# Altium PCB 4layer_main_board.PcbDoc
Units mm, origin at the board's own origin, x right, y up, seen from the top; angles counter-clockwise.
Board outline 50 x 100 mm, 4 copper layers (Top Layer, Int1 (GND), Int2 (PWR), Bottom Layer), stack 1.369 mm thick; 33 components, 53 nets, 250 pads, 73 vias.
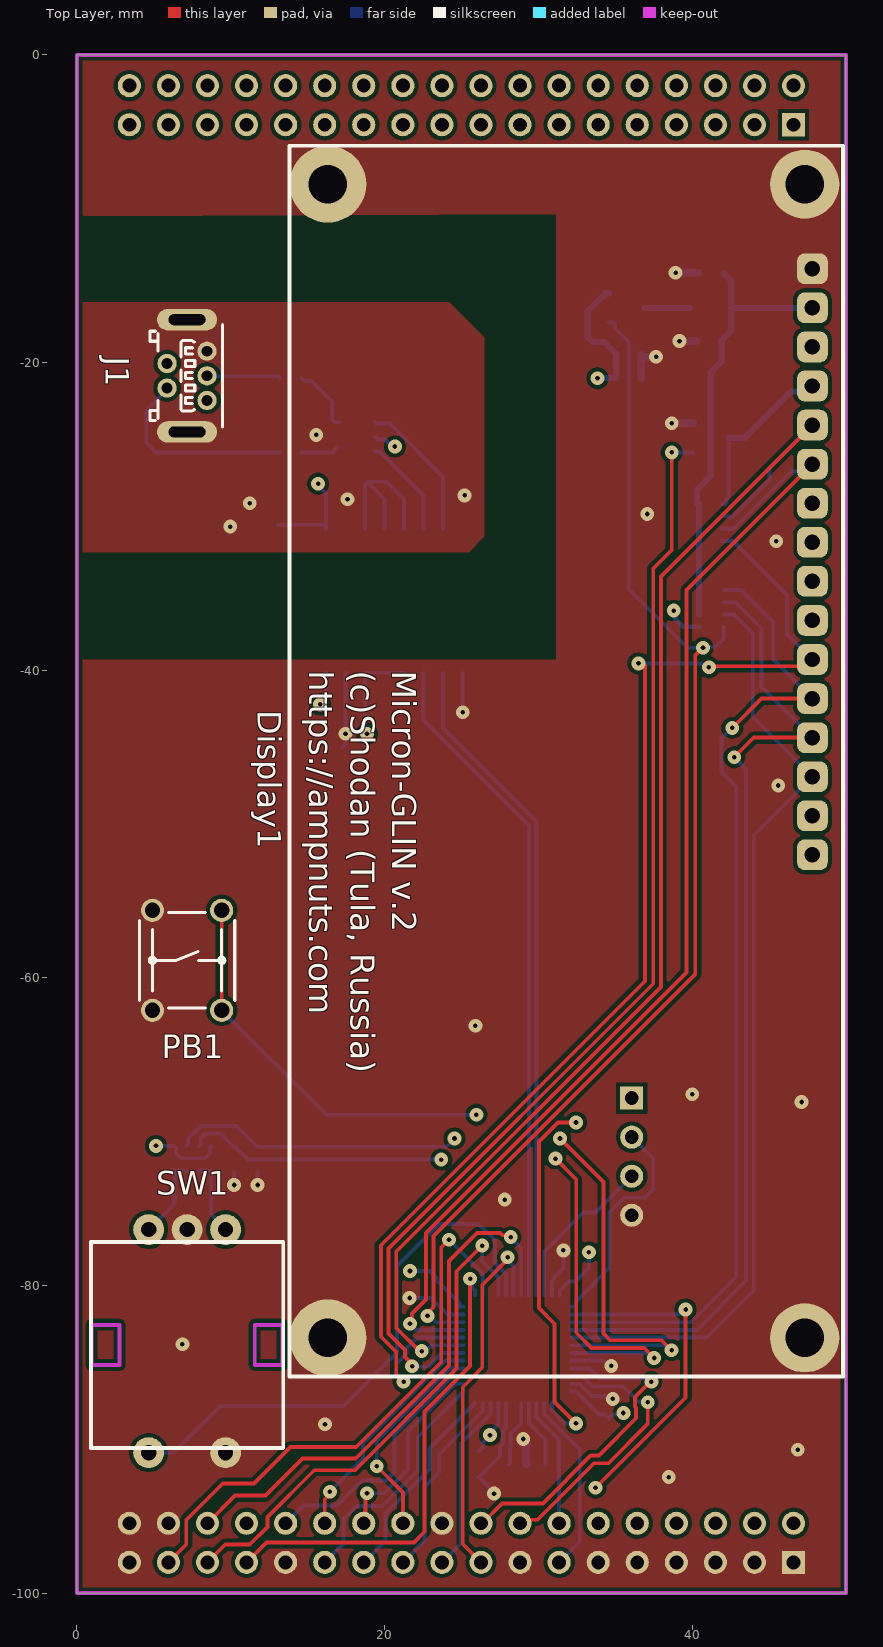
[diagram p0: Top Layer view]
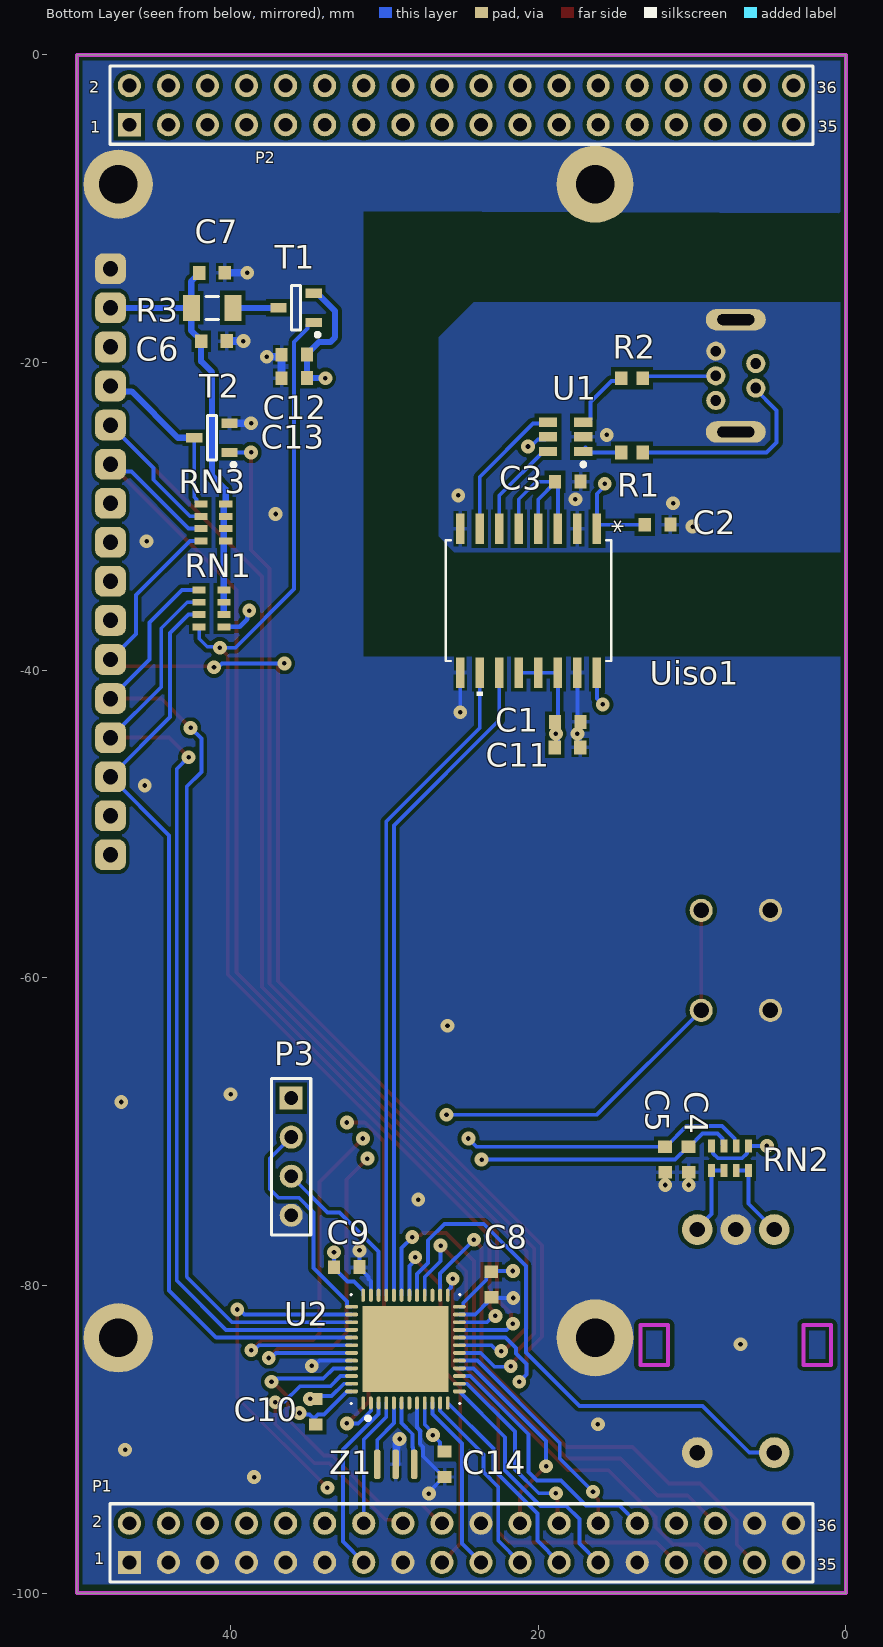
[diagram p1: Bottom Layer view, seen from below]
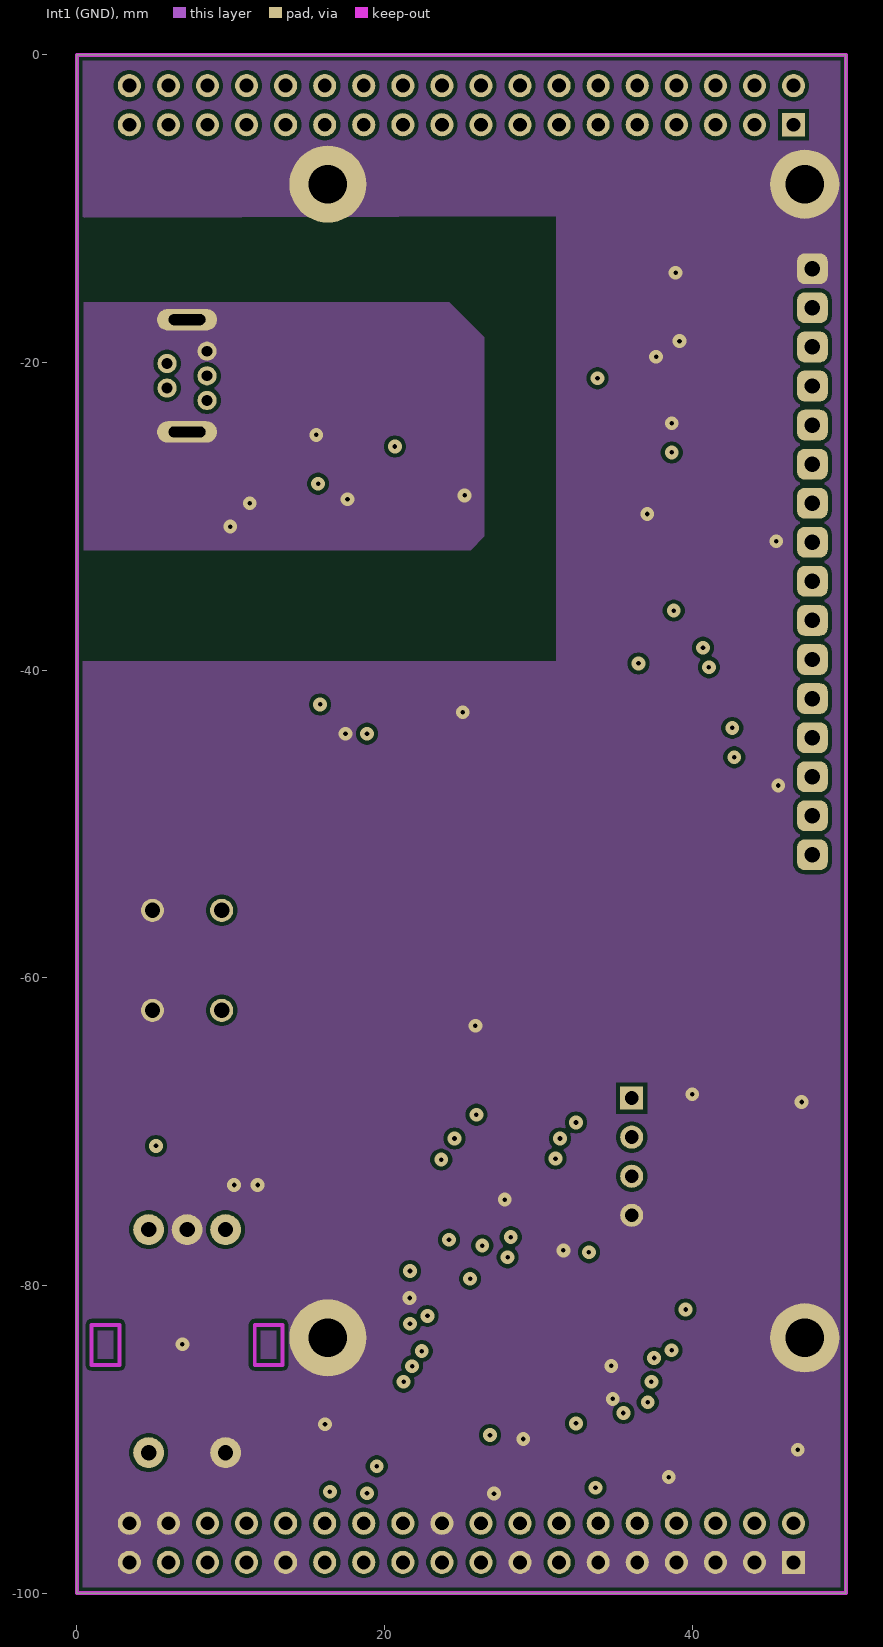
[diagram p2: Int1 (GND)]
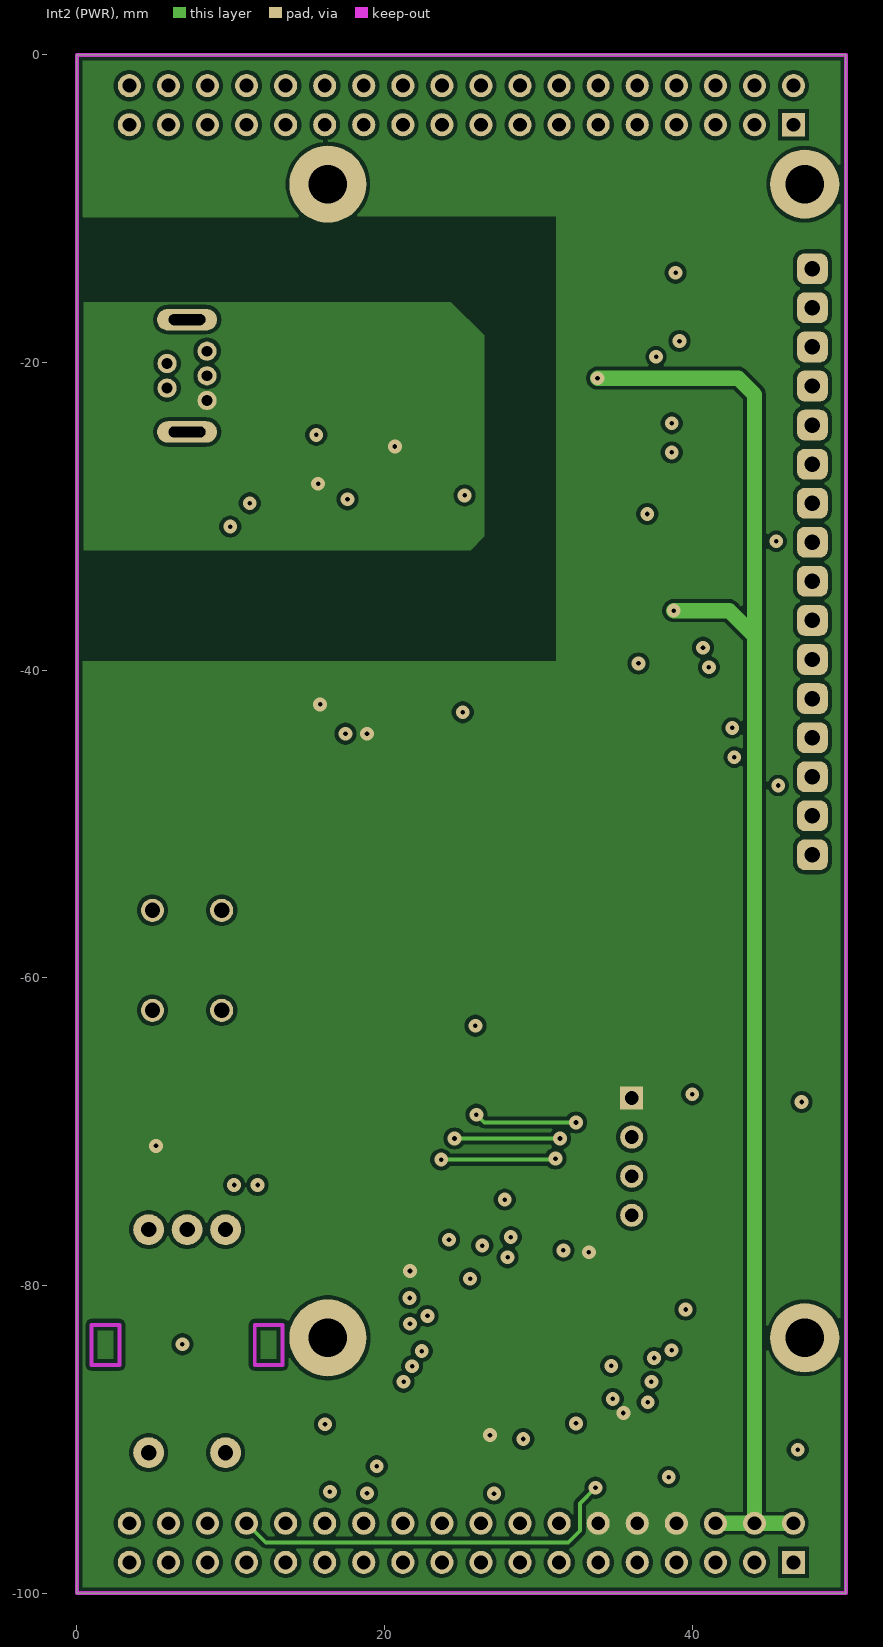
[diagram p3: Int2 (PWR)]
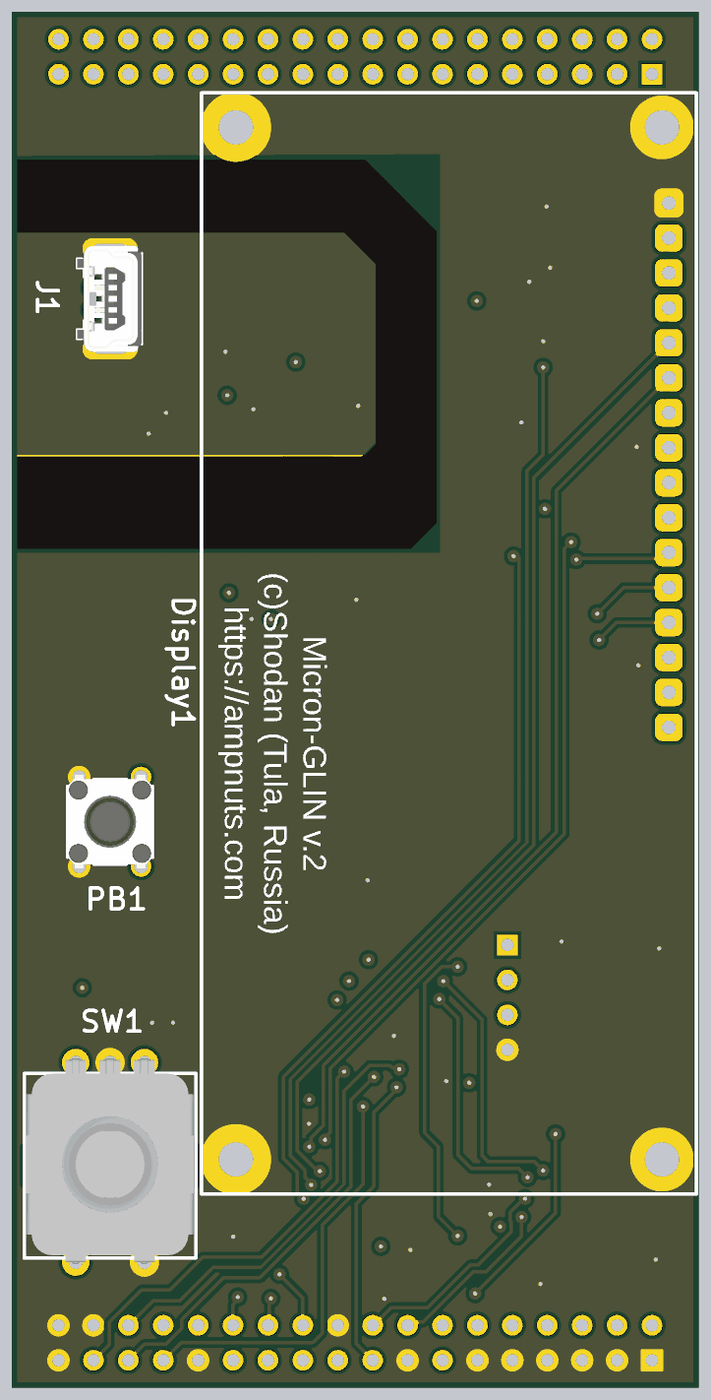
[diagram p4: 3D render of the assembled board from above, using the file's embedded part models]

## Layer stack, top to bottom
Top Solder: solder mask 0.0254, SM-001, Dk 4
Top Layer: signal copper 0.035
Dielectric 1: prepreg 0.1295, PP-017, Dk 4.3
Dielectric 2: prepreg 0.1295, PP-017, Dk 4.3
Int1 (GND): signal copper 0.035
Dielectric 3: core 0.7112, Core-039, Dk 4.8
Int2 (PWR): signal copper 0.035
Dielectric 4: prepreg 0.1295, PP-017, Dk 4.3
Dielectric 5: prepreg 0.1295, PP-017, Dk 4.3
Bottom Layer: signal copper 0.035
Bottom Solder: solder mask 0.0254, SM-001, Dk 4

## Board outline
0,-100 50,-100 50,0 0,0

## Design rules (kind name [scope] priority, off if disabled: settings)
BoardOutlineClearance [All] p1: gap=0.381 ignorepadtopadclearanceinfootprint=FALSE
Clearance "Clearance Polygons" [InPolygon] p1: gap=0.254 ignorepadtopadclearanceinfootprint=FALSE except(0: Arc-Hole Track-Hole SMDPad-Hole THPad-Hole Via-Hole Fill-Hole Poly-Hole Region-Hole Text-Hole)
Clearance [All] p2: gap=0.25 ignorepadtopadclearanceinfootprint=FALSE
ComponentClearance "HM-TRP & UFL" [InComponent('X1') vs InComponent('U1')] p1: gap=0 collisioncheckmode=3 verticalgap=0 showdistances=FALSE
ComponentClearance [All] p2: gap=0.025 collisioncheckmode=3 verticalgap=0.025 showdistances=FALSE
DiffPairsRouting [All] p1: maxlimit=10 minlimit=0.127 mostfreqgap=0.203 toplayer_minwidth=0.127 toplayer_maxwidth=0.381 toplayer_prefwidth=0.203 midlayer1_minwidth=0.127 midlayer1_maxwidth=0.381 midlayer1_prefwidth=0.203 midlayer2_minwidth=0.127 midlayer2_maxwidth=0.381 midlayer2_prefwidth=0.203 bottomlayer_minwidth=0.127 bottomlayer_maxwidth=0.381 bottomlayer_prefwidth=0.203 maxuncoupledlength=12.7
HoleSize [All] p1: absolutevalues=TRUE maxlimit=6.731 minlimit=0.254 maxpercent=80.000 minpercent=20.000
HoleToHoleClearance [All] p1: gap=0.254 allowstackedmicrovias=FALSE
MinimumAnnularRing [All] p1: minimumring=0.102
MinimumSolderMaskSliver [All] p1: minsoldermaskwidth=0
PlaneClearance [All] p1: clearance=0.254
PlaneConnect [All] p1: planeconnectstyle=Relief reliefexpansion=0.102 reliefentries=4 reliefconductorwidth=0.152 reliefairgap=0.152
PolygonConnect PolygonConnect_pwr_gnd [IsPoly] p1: thpad.connectstyle=Direct thpad.reliefconductorwidth=0.254 thpad.reliefentries=4 thpad.polygonreliefangle="90 Angle" thpad.airgapwidth=0.152 smdpad.connectstyle=Relief smdpad.reliefconductorwidth=0.254 smdpad.reliefentries=4 smdpad.polygonreliefangle="90 Angle" smdpad.airgapwidth=0.152 via.connectstyle=Direct via.reliefconductorwidth=0.254 via.reliefentries=4 via.polygonreliefangle="90 Angle" via.airgapwidth=0.152
PolygonConnect PolygonConnect_1 [All] p2: connectstyle=Relief reliefconductorwidth=0.254 reliefentries=4 polygonreliefangle="90 Angle" airgapwidth=0.254
PolygonConnect "Via connect style" [isVia] p3: connectstyle=Direct reliefconductorwidth=0.254 reliefentries=4 polygonreliefangle="90 Angle" airgapwidth=0.254
RoutingCorners [All] p1: cornerstyle=45-Degree minsetback=1.25 maxsetback=1.25
RoutingVias [All] p1: holewidth=0.305 width=0.559 viastyle="Through Hole" minholewidth=0.254 minwidth=0.457 maxholewidth=2.54 maxwidth=2.896
SilkToSilkClearance [All] p1: silktosilkclearance=0
SilkToSolderMaskClearance [IsPad] p1: minsilkscreentomaskgap=0.127 clearancetoexposedcopper=TRUE
SolderMaskExpansion [All] p1: expansion=0.064 istentingtop=FALSE
Width GND [InNet('GND')] p1: maxlimit=0.762 minlimit=0.254 preferedwidth=0.508
Width Power [InNetClass('Power')] p2: maxlimit=1.016 minlimit=0.508 preferedwidth=0.762
Width 3V3 [InNetClass('3V3')] p3: maxlimit=0.762 minlimit=0.254 preferedwidth=0.508
Width [All] p4: maxlimit=10.16 minlimit=0.25 preferedwidth=0.25
20 further rules are at their usual default settings.

## Components (designator, comment, footprint, x,y, rotation, side; value= is the part's Value field where it differs from the comment)
C1 "100nF" "CAP 0603" 18.097,-43.37 r0 bottom
C2 "100nF" "CAP 0603" 12.255,-30.543 r0 bottom
C3 "100nF" "CAP 0603" 18.097,-27.749 r0 bottom
C4 "10nF" "CAP 0603" 10.223,-71.818 r270 bottom
C5 "10nF" "CAP 0603" 11.747,-71.818 r270 bottom
C6 "100nF (0603)" "CAP 0603" 41.084,-18.605 r180 bottom
C7 "10uF (0603)" "CAP 0603" 41.211,-14.16 r180 bottom
C8 "100nF (0603)" "CAP 0603" 23.05,-79.946 r270 bottom
C9 "100nF (0603)" "CAP 0603" 32.448,-78.803 r180 bottom
C10 "100nF (0603)" "CAP 0603" 34.48,-88.201 r90 bottom
C11 "10uF (0603)" "CAP 0603" 18.097,-45.021 r180 bottom
C12 "100nF (0603)" "CAP 0603" 35.877,-19.494 r0 bottom
C13 "10uF (0603)" "CAP 0603" 35.877,-21.018 r0 bottom
C14 "100nF (0603)" "CAP 0603" 26.098,-91.63 r270 bottom
Display1 "WEG010016A" WEG010016A 31.815,-45.906 r270 top locked
J1 "USB" MOLEX_500075-1517 7.163,-20.864 r270 top locked
P1 "Header 18X2" HDR2X18 46.59,-98 r180 bottom locked
P2 "Header 18X2" HDR2X18 46.59,-4.54 r180 bottom locked
P3 "SWD" HDR1X4 36.068,-67.818 r270 bottom
PB1 "Push Button" PB_OMRON_B3F-1070 7.163,-58.864 r270 top locked
R1 "22R" 1608[0603] 13.906,-25.844 r180 bottom
R2 "22R" 1608[0603] 13.906,-21.018 r180 bottom
R3 "Ferrite beard 1k" C1206 41.211,-16.446 r180 bottom
RN1 "CAT16-472J4 (4.7k)" CAT16-470J4LF 42.049,-37.585 r90 bottom
RN2 "CAT16-103J4 (10k)" CAT16-470J4LF 5.937,-72.529 r0 bottom
RN3 "CAT16-472J4 (4.7k)" CAT16-470J4LF 41.922,-31.997 r90 bottom
SW1 "PEC11R-4220K-S0024" PEC11R-4220K-S0024 7.163,-83.864 r180 top locked
T1 "IRLML6402PBF" SOT95P237X112-3N 35.75,-16.446 r0 bottom
T2 "IRLML0060TRPBF" SOT95P237X112-3N 41.218,-24.894 r0 bottom
U1 "USBLC6-2" SOT23-6L 18.224,-24.828 r0 bottom
U2 "STM32L152CBU6" UFQFPN48 28.638,-84.137 r90 bottom
Uiso1 "" RW_16_ADI 20.637,-35.483 r270 bottom
Z1 "8MHZ CSTCE8M00G55-R0" PRQV8.00CR5010Y000 29.273,-91.63 r0 bottom

## Footprints (in the part's own frame and the unit in brackets; to place one, negate y for a bottom-side part, rotate by r counter-clockwise, add the part's x,y. Pads: shape width x height; smd on the part's side, far side on the other; paste and mask are expansions set on the pad)
1608[0603] [mm]
  rect 0.8x0.9 smd: 1(-0.7,0) 2(0.7,0)
  body extent -0.87,-0.48 0.87,0.48, height 1.3
C1206 [mm]
  rect 1.1x1.7 smd: 1(-1.35,0) 2(1.35,0)
  silkscreen extent -0.4,-0.75 0.4,0.75, body extent -1.7,-0.9 1.7,0.9, height 1.3
"CAP 0603" [mm]
  rect 0.8x0.9 smd: 1(-0.84,-0.01) 2(0.82,0)
  body extent -0.85,-0.45 0.85,0.45, height 0.8
CAT16-470J4LF [mm]
  rect 0.45x0.85 smd: 1(0.4,0) 2(1.2,0) 3(2,0) 4(2.8,0) 5(0.4,-1.6) 6(1.2,-1.6) 7(2,-1.6) 8(2.8,-1.6)
  body extent 0,-1.6 3.2,0, height 0.5
HDR1X4 [mm]
  rect 1.5x1.5 hole 0.9: 1(0,0)
  round 1.5 hole 0.9: 2(2.54,0) 3(5.08,0) 4(7.62,0)
  silkscreen extent -1.27,-1.27 8.89,1.27
HDR2X18 [mm] "Connector; Header; 18x2 Position"
  rect 1.5x1.5 hole 0.9: 1(0,0)
  round 1.5 hole 0.9: 2(0,2.54) 3(2.54,0) 4(2.54,2.54) 5(5.08,0) 6(5.08,2.54) 7(7.62,0) 8(7.62,2.54) 9(10.16,0) 10(10.16,2.54) 11(12.7,0) 12(12.7,2.54) 13(15.24,0) 14(15.24,2.54) 15(17.78,0) 16(17.78,2.54) 17(20.32,0) 18(20.32,2.54) 19(22.86,0) 20(22.86,2.54) 21(25.4,0) 22(25.4,2.54) 23(27.94,0) 24(27.94,2.54) 25(30.48,0) 26(30.48,2.54) 27(33.02,0) 28(33.02,2.54) 29(35.56,0) 30(35.56,2.54) 31(38.1,0) 32(38.1,2.54) 33(40.64,0) 34(40.64,2.54) 35(43.18,0) 36(43.18,2.54)
  silkscreen extent -1.27,-1.27 44.45,3.81
MOLEX_500075-1517 [mm] "Straight, USB Serie Mini-B Type 2 Through Hole Receptacle"
  round 1.25 hole 0.7: 1(1.6,1.3) 2(0.8,-1.3) 3(0,1.3) 4(-0.8,-1.3) 5(-1.6,1.3)
  oval 1.4x3.9 hole 0.7 slot 2.4 at 90 deg: 6(-3.65,0) 6(3.65,0)
  silkscreen extent -3.32,-2.4 3.32,2.3, body extent -3.85,-2.4 3.85,2.3, height 7.7
PB_OMRON_B3F-1070 [mm] "6x6mm Model, Horizontal, Flat Plunger Type (without Ground Terminal) Pushbutton Switch, OMRON B3F Series"
  round 1.5 hole 1: 1(-3.25,2.25) 2(3.25,2.25) 3(-3.25,-2.25) 4(3.25,-2.25)
  silkscreen extent -3.1,-3.1 3.1,3.1, body extent -3.4,-3.1 3.4,3.1, height 9.5
PEC11R-4220K-S0024 [mm]
  round 2 hole 1: 1(2.5,7) 2(-2.5,7) A(2.5,-7.5) B(-2.5,-7.5) C(0,-7.5)
  Keep-Out Layer lines w0.254: 6.2,1.3 6.2,-1.3 4.4,-1.3 4.4,1.3 6.2,1.3 ; -4.4,1.3 -4.4,-1.3 -6.2,-1.3 -6.2,1.3 -4.4,1.3
  silkscreen extent -6.25,-6.7 6.25,6.7, body extent -7,-7.8 7,7.1, height 21.6
PRQV8.00CR5010Y000 [mm]
  rrect50% 0.4x1.9 smd: 1(-1.2,0) 2(1.2,0) 3(0,0)
  body extent -1.6,-0.65 1.6,0.65, height 1
RW_16_ADI [mm]
  rect 1.97x0.558 smd paste+0 mask+0: 1(-4.686,4.445) 2(-4.686,3.175) 3(-4.686,1.905) 4(-4.686,0.635) 5(-4.686,-0.635) 6(-4.686,-1.905) 7(-4.686,-3.175) 8(-4.686,-4.445) 9(4.686,-4.445) 10(4.686,-3.175) 11(4.686,-1.905) 12(4.686,-0.635) 13(4.686,0.635) 14(4.686,1.905) 15(4.686,3.175) 16(4.686,4.445)
  silkscreen extent -3.92,-5.37 6.18,5.37, body extent -5.32,-5.25 5.32,5.25, height 2.64
SOT23-6L [mm]
  rect 1.2x0.6 smd: 1(-1.15,0.95) 2(-1.15,0) 3(-1.15,-0.95) 4(1.15,-0.95) 5(1.15,0) 6(1.15,0.95)
  silkscreen extent -1.27,1.68 -1.02,1.92, body extent -0.75,-1.52 0.75,1.53, height 1.45
SOT95P237X112-3N [mm] "SOT, 0.95mm, pitch; 3 pin,1.30mm W X 2.92mm L X 1.12mm H body, IPC Medium Density"
  rect 1.05x0.6 smd: 1(-1.15,0.95) 2(-1.15,-0.95) 3(1.15,0)
  silkscreen extent -1.52,-1.45 0.3,1.87, body extent -1.25,-1.5 1.25,1.5, height 1.1
UFQFPN48 [mm]
  oval 0.85x0.25 smd: 1(-3.5,2.75) 2(-3.5,2.25) 3(-3.5,1.75) 4(-3.5,1.25) 5(-3.5,0.75) 6(-3.5,0.25) 7(-3.5,-0.25) 8(-3.5,-0.75) 9(-3.5,-1.25) 10(-3.5,-1.75) 11(-3.5,-2.25) 12(-3.5,-2.75) 25(3.5,-2.75) 26(3.5,-2.25) 27(3.5,-1.75) 28(3.5,-1.25) 29(3.5,-0.75) 30(3.5,-0.25) 31(3.5,0.25) 32(3.5,0.75) 33(3.5,1.25) 34(3.5,1.75) 35(3.5,2.25) 36(3.5,2.75)
  oval 0.25x0.85 smd: 13(-2.75,-3.5) 14(-2.25,-3.5) 15(-1.75,-3.5) 16(-1.25,-3.5) 17(-0.75,-3.5) 18(-0.25,-3.5) 19(0.25,-3.5) 20(0.75,-3.5) 21(1.25,-3.5) 22(1.75,-3.5) 23(2.25,-3.5) 24(2.75,-3.5) 37(2.75,3.5) 38(2.25,3.5) 39(1.75,3.5) 40(1.25,3.5) 41(0.75,3.5) 42(0.25,3.5) 43(-0.25,3.5) 44(-0.75,3.5) 45(-1.25,3.5) 46(-1.75,3.5) 47(-2.25,3.5) 48(-2.75,3.5)
  rect 5.6x5.6 smd paste-2.5: 49(0,0)
  silkscreen extent -4.62,-3.55 3.55,3.55, body extent -3.51,-3.51 3.51,3.51, height 0.78
WEG010016A [mm]
  rrect50% 2x2 hole 1: 1(-32,16) 2(-29.46,16) 3(-26.92,16) 4(-24.38,16) 5(-21.84,16) 6(-19.3,16) 7(-16.76,16) 8(-14.22,16) 9(-11.68,16) 10(-9.14,16) 11(-6.6,16) 12(-4.06,16) 13(-1.52,16) 14(1.02,16) 15(3.56,16) 16(6.1,16)
  round 4.5 hole 2.5: 17(-37.5,15.5) 17(37.5,15.5)
  round 5 hole 2.5: 17(-37.5,-15.5) 17(37.5,-15.5)
  silkscreen extent -40,-18 40,18

## Part data
C1 C2 C3 C4 C5 C6 C7 C8 C9 C10 C11 C12 C13 C14: library part "Cap Semi", "Capacitor (Semiconductor SIM Model)", LatestRevisionDate=29-May-2009, LatestRevisionNote="IPC-7351 Footprint Added.", Order=CC0603KRX7R8BB104, PackageDescription="Chip Capacitor", PackageReference=C1206, Published=8-Jun-2000, Publisher="Altium Limited"
J1: library part MOLEX_500075-1517, "5 Pin + 1 Shield USB Receptacle", Manufacturer=MOLEX, Manufacturer Part Number=500075-1517, Author="CERN DEM JLC", Component Type=Standard, ComponentHeight=7.7mm, CreateDate=25.07.2012, Family=USB, HelpURL=\\cern.ch\dfs\Applications\Altium\Datasheets\MOLEX_500075-1517.pdf, LatestRevisionDate=25.07.2012, Mounted=Yes, Part Description="USB Mini-B Serie Type 2 Through Hole Straight Receptacle", Part Number=MOLEX_500075-1517, Pin Count=6, PressFit=No, Sense=No, SMD=No, Socket=No, Status=None
P1 P2: "Header, 18-Pin, Dual row", LatestRevisionDate=17-Jul-2002, LatestRevisionNote="Re-released for DXP Platform.", Publisher="Altium Limited"
P3: library part "Header 4", "Header, 4-Pin", LatestRevisionDate=17-Jul-2002, LatestRevisionNote="Re-released for DXP Platform.", Publisher="Altium Limited"
PB1: library part PB_OMRON_B3F-1070, "Push-Button Switch SPDT", Manufacturer=OMRON, Manufacturer Part Number=B3F-1070, Author="CERN DEM JLC", Component Type=Standard, ComponentHeight=9.5mm, CreateDate=06.05.2009, Family="Push Button", HelpURL=\\cern.ch\dfs\Applications\Altium\Datasheets\PB_OMRON_B3F-1070.pdf, LatestRevisionDate=06.05.2009, Mounted=Yes, PackageDescription="6x6mm Model, Horizontal, Flat Plunger Type (without Ground Terminal) Pushbutton Switch, OMRON B3F Series", Part Description="24VDC 50mA SPST-NO Tactile Push-Button Switch (h=9.5mm)", Part Number=PB_OMRON_B3F-1070, Pin Count=4, PressFit=No, Sense=No, SMD=No, Socket=No, Status=None
R1 R2 R3: library part "Resistor 0805", Avail=20, Order=CR0603-JW-220GLF
RN1 RN2 RN3: library part CAT16-470J4LF
T1: "P-CHANNEL MOSFET WITH ZENER DIODE", Case=SOT23-3, Manufacturer="INTERNATIONAL RECTIFIER", Author="CERN DEM JLC", Bonding=No, Component Type=Standard, ComponentHeight=1.12mm, CreateDate=29.08.2011, Device=IRLML6402PBF, HelpURL=\\cern.ch\dfs\Applications\Altium\Datasheets\IRLML6402PBF.pdf, LatestRevisionDate=29.08.2011, Manufacturer Part Number=IRLML6402PBF, Mounted=Yes, PackageDescription="SOT, 0.95mm, pitch; 3 pin,1.30mm W X 2.92mm L X 1.12mm H body, IPC Medium Density", Part Description="-20V -3.7A P-Channel HEXFET® Power MOSFET", Part Number=IRLML6402PBF, Pin Count=3, PressFit=No, Sense=No, SMD=Yes, Socket=No
T2: "N-CHANNEL MOSFET WITH DIODE", Case=SOT23-3, Manufacturer="INTERNATIONAL RECTIFIER", Author="CERN DEM JLC", Bonding=No, Component Type=Standard, ComponentHeight=1.12mm, CreateDate=06.10.2011, Device=IRLML0060TRPBF, HelpURL=\\cern.ch\dfs\Applications\Altium\Datasheets\IRLML0060TRPBF.pdf, LatestRevisionDate=06.10.2011, Manufacturer Part Number=IRLML0060TRPBF, Mounted=Yes, PackageDescription="SOT, 0.95mm, pitch; 3 pin,1.30mm W X 2.92mm L X 1.12mm H body, IPC Medium Density", Part Description="60V 2.7A N-Channel HEXFET® Power MOSFET", Part Number=IRLML0060TRPBF, Pin Count=3, PressFit=No, Sense=No, SMD=Yes, Socket=No
Uiso1: library part ADUM4160BRWZ, "No Description Available", Built_By=EMA_UL_Team, Copyright="Copyright (C) 2018 Accelerated Designs. All rights reserved", Manufacturer_Part_Number=ADUM4160BRWZ, RefDes=RefDes, SourceLibrary=Analog_2015-12-15, Type=DEV, Vendor="Analog Devices Inc"
Z1: library part 8MHZ_cap
U1: Avail=1, Order=USBLC6-2

## Via types
v1: diameter 0.9, hole 0.3, Top Layer to Bottom Layer, tented both sides, 73 vias

## Nets (pads, with @x,y where several pads share a name; then routed paths per layer and width w, separated by ;. In a path a pad name is that pad's centre, name@x,y a point inside that pad or via, vN(x,y) a via of type N, cw(c..) or ccw(c..) an arc to the next point about the centre after c; other vN are vias at no path point)
+3.3V: C1.2 C8.1 C9.1 C10.1 C11.1 C14.1 P1.8 P1.10 P1.12 P3.1 RN2.5 RN2.8 U2.9 U2.24 U2.36 U2.48 Uiso1.12 Uiso1.13 Uiso1.14 Uiso1.16 | length 31.1
  Top Layer w0.4: P1.12@33.838,-95.408 P1.12
  Top Layer w0.7: P1.8 P1.8@38.982,-95.448
  Bottom Layer w0.25: v1(5.143,-70.929) RN2.5 6.437,-71.029 6.437,-71.409 6.757,-71.729 8.317,-71.729 8.637,-71.409 8.637,-71.029 RN2.8 ; v1(15.811,-42.227) 16.192,-41.846 Uiso1.16 ; C11.1 18.732,-44.826 Uiso1.14 Uiso1.13 Uiso1.12 ; v1(21.653,-79.057) 22.961,-79.057 23,-79.096 23,-79.123 23.385,-79.508 23.385,-79.634 24.884,-81.133 24.884,-81.387 U2.24 ; C14.1 26.12,-90.79 26.395,-90.515 26.395,-90.196 26.796,-89.795 26.796,-89.651 27.194,-89.254 27.194,-89.223 27.388,-89.029 U2.9 ; U2.36 31.388,-80.337 31.988,-79.737 32.414,-79.737 33.288,-78.863 C9.1 v1(33.288,-77.836) ; U2.48 32.438,-86.887 33.936,-88.385 34.322,-88.385 34.597,-88.66 34.872,-88.385 35.439,-88.385 v1@35.623,-88.201
  other v1: 26.86,-89.725 35.531,-88.293 18.859,-44.132
+5USB: C2.2 J1.1 U1.5 Uiso1.1 | length 7.9
  Bottom Layer w0.25: C2.2 16.038,-30.543 Uiso1.1@16.192,-30.697 ; v1(15.684,-27.876) 15.684,-28.027 16.192,-28.535 Uiso1.1@16.192,-30.697 ; Uiso1.1 Uiso1.1@16.192,-30.697 ; U1.5 19.549,-25.003 20.039,-25.003 20.498,-25.462 v1(20.674,-25.462)
+5V: C12.1 C13.1 P1.2 P1.4 P1.6 RN1.5 T1.2 | length 106.2
  Int2 (PWR) w1: v1(33.845,-21.018) 42.989,-21.018 44.05,-22.079 44.05,-37.782 ; v1(38.798,-36.131) 42.399,-36.131 44.05,-37.782 ; P1.6 P1.4 ; P1.2 P1.4 ; P1.4 44.05,-37.782
  Bottom Layer w0.3: v1(38.798,-36.131) 38.913,-36.246 38.913,-36.688 39.41,-37.185 40.367,-37.185 RN1.5
  Bottom Layer w0.4: v1@33.601,-21.008 C13.1 C12.1 35.037,-19.434 34.271,-18.668 33.527,-18.668 33.21,-18.351 33.21,-16.661 34.375,-15.496 T1.2
Control_bus_0: P1.19 U2.10 | length 11.7
  Bottom Layer w0.25: P1.19 24.955,-96.775 24.955,-90.284 26.888,-88.351 U2.10
Control_bus_1: P1.21 U2.11 | length 12.5
  Bottom Layer w0.25: P1.21 22.605,-96.585 22.605,-93.091 23.558,-92.138 23.558,-90.974 26.388,-88.144 U2.11
Control_bus_2: P1.23 U2.12 | length 13.4
  Bottom Layer w0.25: P1.23 20.065,-96.585 20.065,-94.831 22.923,-91.973 22.923,-90.602 U2.12
Control_bus_3: P1.25 U2.13 | length 15.8
  Bottom Layer w0.25: P1.25 17.335,-96.775 17.335,-95.184 18.184,-94.335 19.854,-94.335 22.161,-92.028 22.161,-89.864 U2.13
COUNT_EN: P1.13 U2.3 | length 11.9
  Bottom Layer w0.25: U2.3 30.388,-88.355 32.694,-90.661 32.694,-96.656 P1.13
CPU_IRQ: P1.17 U2.30 | length 24.2
  Top Layer w0.25: P1.17 25.082,-96.812 25.082,-86.613 26.352,-85.343 26.352,-79.971 28.002,-78.321 v1(28.002,-78.167)
  Bottom Layer w0.25: v1(28.002,-78.167) 28.002,-78.343 28.388,-78.729 U2.30
DAC_ALARM: P1.32 U2.31 | length 35.7
  Top Layer w0.25: P1.32 10.288,-93.662 12.255,-93.662 14.668,-91.249 18.128,-91.249 24.185,-85.192 24.185,-78.406 26.01,-76.581 27.51,-76.581 27.662,-76.733 28.078,-76.733 v1(28.202,-76.857)
  Bottom Layer w0.25: v1(28.202,-76.857) 28.202,-76.877 28.888,-77.563 U2.31
DAC_CLR: P1.30 U2.38 | length 47.3
  Top Layer w0.25: v1(33.718,-93.154) 39.571,-87.301 v1(39.571,-81.562)
  Int2 (PWR) w0.25: P1.30 12.28,-96.71 31.94,-96.71 32.702,-95.948 32.702,-94.17 v1(33.718,-93.154)
  Bottom Layer w0.25: U2.38 39.1,-81.887 39.425,-81.562 v1(39.571,-81.562)
DGND: C1.1 C4.2 C5.2 C6.2 C7.2 C8.2 C9.2 C10.2 C11.2 C12.2 C13.2 C14.2 Display1.1 Display1.17 P1.1 P1.3 P1.5 P1.7 P1.9 P1.11 P1.15 P1.20 P1.27 P1.34 P1.35 P1.36 P3.4 PB1.3 PB1.4 SW1.2 SW1.C T2.2 U2.8 U2.23 U2.35 U2.44 U2.47 Uiso1.9 Uiso1.15 Z1.3 | length 38
  Top Layer w0.4: P1.20 P1.20@23.73,-95.162
  Bottom Layer w0.25: v1(10.223,-73.469) C4.2 ; v1(11.747,-73.469) C5.2 ; C11.2 17.462,-44.836 Uiso1.15 ; v1(21.629,-80.811) 22.968,-80.811 23.05,-80.893 23.359,-81.168 ccw(c23.395,-81.119) 23.395,-81.18 23.859,-81.644 24.102,-81.887 U2.23 ; Uiso1.9 v1(25.082,-42.735) v1@25.336,-42.989 ; C14.2 C14.2@26.148,-92.45 ; v1(27.114,-93.535) 27.114,-93.416 C14.2@26.148,-92.45 ; U2.8 27.888,-89.236 27.694,-89.43 27.694,-89.461 27.693,-89.462 27.693,-90.292 27.498,-90.487 27.498,-91.1 C14.2@26.148,-92.45 ; U2.35 30.888,-79.723 31.035,-79.576 31.035,-79.446 31.628,-78.853 v1(31.628,-77.718) ; U2.47 32.645,-86.387 33.443,-87.185 34.284,-87.185 C10.2 ; U2.44 34.22,-84.887 34.558,-85.225 v1(34.734,-85.225) ; C10.2@34.744,-87.187 34.744,-87.314 34.805,-87.375 v1(34.838,-87.375)
  Bottom Layer w0.5: v1(29.019,-89.979) 29.019,-90.087 29.223,-90.291 29.223,-91.58 Z1.3 ; C13.2 C12.2 36.824,-19.621 v1(37.655,-19.621) ; v1@38.671,-23.939 v1(38.676,-23.944) T2.2 ; v1(38.925,-14.16) C7.2 ; v1(39.179,-18.605) C6.2
  other v1: 38.481,-92.456 46.863,-90.678 16.129,-89.027 6.858,-83.82 27.813,-74.422 47.117,-68.072 40.005,-67.564 25.908,-63.119 45.593,-47.498 17.462,-44.132 45.466,-31.623 37.084,-29.845
Display_DB4: Display1.11 RN3.1 U2.20 | length 83.3
  Top Layer w0.25: v1(21.24,-86.264) 20.764,-85.788 20.764,-84.336 19.764,-83.336 19.764,-77.387 36.927,-60.223 36.927,-39.706 36.781,-39.56 v1(36.512,-39.56) ; v1(41.084,-39.814) 41.15,-39.747 47.373,-39.747 Display1.11
  Bottom Layer w0.25: v1(21.24,-86.264) 20.764,-85.788 20.764,-85.098 21.445,-84.417 21.445,-84.068 22.125,-83.387 U2.20 ; v1(36.512,-39.56) 40.576,-39.56 v1@40.83,-39.814 ; RN3.1 42.646,-31.597 46.164,-35.115 46.164,-37.655 Display1.11
Display_DB5: Display1.12 RN1.4 U2.39 | length 64.4
  Top Layer w0.25: v1(42.608,-43.751) 44.513,-41.846 45.021,-41.846 Display1.12
  Bottom Layer w0.25: U2.39 39.913,-82.387 42.862,-79.438 42.862,-47.561 41.91,-46.609 41.91,-44.449 v1(42.608,-43.751) ; RN1.4 43.167,-34.785 45.275,-36.893 45.275,-39.306 Display1.12
Display_DB6: Display1.13 RN1.3 U2.40 | length 64.3
  Top Layer w0.25: v1(42.735,-45.656) 44.005,-44.386 Display1.13
  Bottom Layer w0.25: U2.40 40.302,-82.887 43.505,-79.684 43.505,-46.426 v1(42.735,-45.656) ; RN1.3 42.824,-35.585 44.513,-37.274 44.513,-41.084 Display1.13
Display_DB7: Display1.14 RN1.2 U2.41 | length 61.4
  Bottom Layer w0.25: U2.41 40.945,-83.387 44.005,-80.327 44.005,-50.736 Display1.14 43.941,-43.052 43.941,-37.591 42.735,-36.385 RN1.2
Display_EN: Display1.6 RN3.2 U2.21 | length 78
  Top Layer w0.25: v1(21.653,-82.486) 21.777,-82.362 21.777,-81.83 22.685,-80.922 22.685,-76.587 39.623,-59.649 39.623,-34.798 Display1.6
  Bottom Layer w0.25: v1(21.653,-82.486) 22.054,-82.887 U2.21 ; RN3.2 42.735,-30.797 46.44,-27.092 47.329,-27.092 Display1.6
Display_Power: RN1.1 T1.1 U2.22 | length 79.8
  Top Layer w0.25: v1(22.796,-81.978) 22.796,-81.802 23.185,-81.413 23.185,-76.794 40.195,-59.784 40.195,-39.052 v1(40.703,-38.544)
  Bottom Layer w0.25: v1@23.05,-82.105 23.332,-82.387 U2.22 ; T1.1 34.825,-17.396 35,-17.571 35,-17.796 35.877,-18.673 35.877,-34.734 39.687,-38.544 v1(40.703,-38.544) 40.766,-38.481 41.528,-38.481 42.049,-37.96 RN1.1
Display_RS: Display1.4 RN3.4 T2.3 | length 11.4
  Bottom Layer w0.25: RN3.4 42.122,-29.197 42.222,-29.097 42.222,-28.897 42.368,-28.751 T2.3
  Bottom Layer w0.4: T2.3 43.431,-24.894 46.449,-21.876 47.465,-21.876 Display1.4
Display_RW: Display1.5 RN3.3 U2.19 | length 83.6
  Top Layer w0.25: v1(22.415,-84.264) 22.264,-84.264 20.764,-82.764 20.764,-77.801 37.973,-60.592 37.973,-33.908 Display1.5
  Bottom Layer w0.25: v1@22.669,-84.264 23.046,-83.887 U2.19 ; RN3.3 42.646,-29.997 45.021,-27.622 45.021,-26.86 Display1.5
Encode_A: C5.1 RN2.6 U2.42 | length 51.2
  Top Layer w0.25: v1(31.408,-70.445) 34.226,-73.264 34.226,-83.121 34.671,-83.566 38.018,-83.566 v1(38.664,-84.212)
  Int2 (PWR) w0.25: v1(24.55,-70.445) v1(31.408,-70.445)
  Bottom Layer w0.25: RN2.6 7.237,-70.829 7.237,-70.449 8.057,-69.629 10.358,-69.629 11.707,-70.978 C5.1 24.017,-70.978 v1(24.55,-70.445) ; U2.42 38.163,-83.887 38.488,-84.212 v1(38.664,-84.212)
Encode_B: C4.1 RN2.7 U2.43 | length 47.7
  Top Layer w0.25: v1(31.114,-71.754) 32.463,-73.103 32.463,-83.076 33.453,-84.066 36.882,-84.066 v1(37.528,-84.712)
  Int2 (PWR) w0.25: v1(23.685,-71.818) 31.051,-71.818 v1(31.114,-71.754) v1@31.178,-71.691
  Bottom Layer w0.25: RN2.7 8.037,-70.829 8.037,-70.449 8.357,-70.129 9.334,-70.129 10.183,-70.978 C4.1 10.283,-70.978 11.123,-71.818 v1(23.685,-71.818) ; U2.43 37.057,-84.387 37.382,-84.712 v1(37.528,-84.712)
Encode_push: SW1.1 U2.29 | length 36.3
  Bottom Layer w0.25: SW1.1 6.29,-90.864 9.325,-87.829 17.326,-87.829 20.804,-84.351 20.804,-78.739 23.546,-75.997 26.11,-75.997 27.177,-77.064 27.177,-78.54 27.888,-79.251 U2.29
NetC3_2: C3.2 Uiso1.3 Uiso1.4 Uiso1.5 | length 11.4
  Bottom Layer w0.25: Uiso1.3 18.732,-27.934 C3.2 ; Uiso1.4 20.002,-28.884 18.917,-27.799 C3.2 ; Uiso1.5 21.272,-28.892 20.129,-27.749 C3.2
NetJ1_2: J1.2 R1.2 | length 13.1
  Bottom Layer w0.25: J1.2@5.963,-21.664 4.508,-23.119 4.508,-25.19 5.162,-25.844 R1.2
NetJ1_3: J1.3 R2.2 | length 4.8
  Bottom Layer w0.25: J1.3@8.475,-20.891 13.079,-20.891 R2.2
NetP3_2: P3.2 U2.37 | length 14.8
  Bottom Layer w0.25: U2.37 32.438,-81.387 32.438,-81.043 34.607,-78.874 34.607,-75.248 35.56,-74.295 36.892,-74.295 37.465,-73.722 37.465,-71.755 P3.2
NetP3_3: P3.3 U2.34 | length 10.6
  Bottom Layer w0.25: U2.34 30.388,-77.791 32.923,-75.257 33.709,-75.257 P3.3
NetR1_1: R1.1 U1.1 | length 2.5
  Bottom Layer w0.25: R1.1 16.613,-25.844 U1.1@16.954,-25.503
NetR2_1: R2.1 U1.3 | length 4.3
  Bottom Layer w0.25: R2.1 14.792,-21.204 15.235,-21.204 16.599,-22.568 16.599,-23.703 16.774,-23.878 U1.3
NetR3_2: R3.2 T1.3 | length 3
  Bottom Layer w0.4: T1.3 R3.2
NetRN2_1: RN2.1 RN2.2 SW1.A | length 5.3
  Bottom Layer w0.25: SW1.A 6.337,-74.69 RN2.1 RN2.2
NetRN2_3: RN2.3 RN2.4 SW1.B | length 5
  Bottom Layer w0.25: RN2.3 RN2.4 8.737,-75.345 9.663,-76.271 SW1.B
NetT2_1: T2.1 U2.18 | length 72.8
  Top Layer w0.25: v1(21.793,-85.255) 21.793,-85.117 21.335,-84.659 21.335,-84.2 20.264,-83.129 20.264,-77.594 37.473,-60.385 37.473,-33.392 38.671,-32.194 v1(38.671,-25.844)
  Bottom Layer w0.25: v1(21.793,-85.255) 21.817,-85.28 22.851,-85.28 23.744,-84.387 U2.18 ; v1(38.671,-25.844) T2.1
NetU1_4: U1.4 Uiso1.7 | length 9.3
  Bottom Layer w0.25: U1.4 19.467,-23.971 20.349,-23.971 23.812,-27.434 Uiso1.7
NetU1_6: U1.6 Uiso1.6 | length 6.5
  Bottom Layer w0.25: U1.6 19.674,-25.778 22.542,-28.646 Uiso1.6
NetU2_5: U2.5 Z1.2 | length 4.4
  Bottom Layer w0.25: U2.5 29.388,-88.951 30.473,-90.036 Z1.2
NetU2_6: U2.6 Z1.1 | length 4.3
  Bottom Layer w0.25: Z1.1 28.148,-91.555 28.148,-90.544 28.193,-90.499 28.193,-89.669 28.194,-89.668 28.194,-89.637 28.888,-88.943 U2.6
PW_DIS: C6.1 C7.1 Display1.2 R3.1 RN1.6 RN1.7 RN1.8 RN3.5 RN3.6 RN3.7 RN3.8 | length 28.7
  Bottom Layer w0.4: RN1.6 RN1.7 RN1.8 40.449,-29.222 40.424,-29.197 RN3.8 40.322,-28.257 41.211,-27.368 41.211,-20.637 41.924,-19.924 C6.1 41.924,-18.565 42.561,-17.928 R3.1 ; C7.1 42.051,-14.22 42.561,-14.73 R3.1 ; Display1.2 R3.1
Relay_cs: P1.14 U2.4 | length 8.4
  Bottom Layer w0.25: U2.4 29.888,-88.562 31.35,-90.024 P1.14
SPI1_MISO: P1.22 U2.16 | length 13.7
  Top Layer w0.25: v1(19.494,-91.757) 21.19,-93.453 P1.22
  Bottom Layer w0.25: v1(19.494,-91.757) 19.494,-90.11 24.217,-85.387 U2.16
SPI1_MOSI: P1.26 U2.17 | length 15
  Top Layer w0.25: P1.26 16.11,-93.92 16.446,-93.584 v1(16.446,-93.408)
  Bottom Layer w0.25: v1(16.446,-93.408) 18.605,-91.249 18.605,-90.233 23.951,-84.887 U2.17
SPI1_NSS: P1.24 U2.14 | length 12.7
  Top Layer w0.25: P1.24 18.755,-95.355 18.755,-93.614 v1(18.859,-93.51)
  Bottom Layer w0.25: v1(18.859,-93.51) 19.972,-93.51 21.526,-91.956 21.526,-89.492 24.631,-86.387 U2.14
SPI1_SCK: P1.28 U2.15 | length 17
  Bottom Layer w0.25: P1.28 14.733,-94.297 16.905,-94.297 18.517,-92.685 20.09,-92.685 20.637,-92.138 20.637,-89.674 24.424,-85.887 U2.15
SPI2_MOSI: P1.31 U2.28 | length 34.1
  Top Layer w0.25: P1.31 9.647,-96.843 11.238,-96.843 12.382,-95.699 12.382,-95.057 15.428,-92.011 18.073,-92.011 24.685,-85.399 24.685,-79.073 v1(26.352,-77.406)
  Bottom Layer w0.25: v1(26.352,-77.406) 26.352,-78.422 27.388,-79.458 U2.28
SPI2_NSS: P1.29 U2.25 | length 31.3
  Top Layer w0.25: P1.29 12.32,-96.71 21.907,-96.71 22.605,-96.012 22.605,-88.186 25.563,-85.228 v1(25.563,-79.562)
  Bottom Layer w0.25: v1(25.563,-79.562) 25.687,-79.686 25.687,-80.136 25.888,-80.337 U2.25
SPI2_SCK: P1.33 U2.26 | length 36.7
  Top Layer w0.25: P1.33 7.107,-96.843 7.107,-95.252 9.48,-92.879 11.514,-92.879 13.888,-90.505 18.165,-90.505 23.685,-84.985 23.685,-77.533 v1(24.193,-77.025)
  Bottom Layer w0.25: v1(24.193,-77.025) 26.388,-79.22 U2.26
Start_button: PB1.1 PB1.2 U2.2 | length 57.2
  Top Layer w0.25: PB1.2 PB1.1 ; v1(32.448,-88.963) 31.051,-87.566 31.051,-82.486 30.035,-81.47 30.035,-70.651 31.281,-69.405 v1(32.448,-69.405)
  Int2 (PWR) w0.25: v1(25.971,-68.897) 26.479,-69.405 v1(32.448,-69.405)
  Bottom Layer w0.25: PB1.2 16.196,-68.897 v1(25.971,-68.897) ; U2.2 30.888,-88.144 31.707,-88.963 v1(32.448,-88.963)
TMP117_SCL: P1.18 U2.45 | length 21.4
  Top Layer w0.25: P1.18 26.356,-95.46 27.646,-94.17 30.292,-94.17 33.402,-91.06 33.931,-91.06 36.356,-88.635 36.356,-87.951 36.282,-87.877 36.282,-87.255 37.282,-86.255 v1(37.351,-86.255)
  Bottom Layer w0.25: U2.45 33.317,-85.387 33.98,-86.05 36.971,-86.05 37.175,-86.255 v1(37.351,-86.255)
TMP117_SDA: P1.16 U2.46 | length 18.1
  Top Layer w0.25: P1.16 29.036,-95.234 29.935,-95.234 33.609,-91.56 34.55,-91.56 37.107,-89.003 v1(37.107,-87.597)
  Bottom Layer w0.25: U2.46 32.852,-85.887 33.515,-86.55 35.496,-86.55 36.491,-87.545 37.056,-87.545 v1(37.107,-87.597)
USB+DATA: U2.33 Uiso1.10 | length 43
  Bottom Layer w0.25: Uiso1.10 23.812,-43.751 29.888,-49.827 U2.33
USB-DATA: U2.32 Uiso1.11 | length 43.3
  Bottom Layer w0.25: Uiso1.11 22.542,-43.243 29.388,-50.089 U2.32
USB_GND: C2.1 C3.1 J1.5 J1.6 U1.2 Uiso1.2 Uiso1.8
  other v1: 9.969,-30.67 11.239,-29.146 17.589,-28.892 25.209,-28.638 15.557,-24.701
pads on no net: Display1.3 Display1.7 Display1.8 Display1.9 Display1.10 Display1.15 Display1.16 J1.4 P2.1 P2.2 P2.3 P2.4 P2.5 P2.6 P2.7 P2.8 P2.9 P2.10 P2.11 P2.12 P2.13 P2.14 P2.15 P2.16 P2.17 P2.18 P2.19 P2.20 P2.21 P2.22 P2.23 P2.24 P2.25 P2.26 P2.27 P2.28 P2.29 P2.30 P2.31 P2.32 P2.33 P2.34 P2.35 P2.36 U2.1 U2.7 U2.27 U2.49

## Polygon pours and split planes (outlines as drawn)
no net on Bottom Solder "NONET_L-01_P-001" (solid): -2.922,-32.194 25.717,-32.194 26.479,-31.432 26.479,-18.351 24.193,-16.065 -2.096,-16.065 -2.096,-10.731 25.717,-10.731 30.924,-15.938 30.924,-37.147 29.019,-39.052 -3.049,-39.052
no net on Top Solder "NONET_L-01_P-001" (solid): -2.922,-32.194 25.717,-32.194 26.479,-31.432 26.479,-18.351 24.193,-16.065 -2.096,-16.065 -2.096,-10.731 25.717,-10.731 30.924,-15.938 30.924,-37.147 29.019,-39.052 -3.049,-39.052
DGND on Int1 (GND) "DGND_L02_P004" (solid, pour order 4): 0.063,-10.604 0.063,-0.063 50.355,-0.063 50.355,-99.758 0.063,-99.758 0.063,-39.433 31.178,-39.433 31.178,-10.477
USB_GND on Int1 (GND) "USB_GND_L02_P000" (solid, pour order 0): 0.444,-16.065 24.193,-16.065 26.479,-18.351 26.479,-31.305 25.59,-32.194 0.444,-32.194
+3.3V on Int2 (PWR) "+3.3V_L03_P006" (solid, pour order 6): 0.063,-10.604 0.063,-0.063 50.355,-0.063 50.355,-99.758 0.063,-99.758 0.063,-39.433 31.178,-39.433 31.178,-10.477
+5USB on Int2 (PWR) "+5USB_L03_P001" (solid, pour order 1): 0.444,-16.065 24.32,-16.065 26.479,-18.224 26.479,-31.305 25.59,-32.194 0.444,-32.194
DGND on Top Layer "DGND_L01_P008" (solid, pour order 8): 0.063,-10.477 0.063,0.064 50.355,0.064 50.355,-99.631 0.063,-99.631 0.063,-39.306 31.178,-39.306 31.178,-10.35
USB_GND on Top Layer "USB_GND_L01_P002" (solid, pour order 2): 0.317,-16.065 24.193,-16.065 26.479,-18.351 26.479,-31.305 25.463,-32.321 0.317,-32.321
DGND on Bottom Layer "DGND_L04_P007" (solid, pour order 7): 0.253,-10.286 0.253,0.255 50.545,0.255 50.545,-99.44 0.253,-99.44 0.253,-39.115 31.368,-39.115 31.368,-10.159
USB_GND on Bottom Layer "USB_GND_L04_P003" (solid, pour order 3): 0.317,-16.065 24.193,-16.065 26.479,-18.351 26.479,-31.305 25.463,-32.321 0.317,-32.321

## Keep-outs
Keep-Out Layer:
  lines w0.254: 0.381,0 0,0 ; 49.022,-100 49.974,-100 ; 49.022,0 49.974,0 ; 0,0 0,-100 50,-100 50,0 0,0

## Silkscreen, mask and mechanical layers (free items; w line width, h text height)
Top Overlay:
  text "Micron-GLIN v.2 / (c)Shodan (Tula, Russia) / https://ampnuts.com" at 14.589,-40.046 h2.7 r270

## Dimensions
3.41,-98 to 0,-100 on Mechanical 1
3.41,-2 to 0,0 on Mechanical 1

## Text inside footprints (layer, text, board x,y; h text height)
Display1: Mechanical 1 "Display cutout" at 42.72,-6.438 h0.52 r270; Mechanical 1 "Display dark field" at 37.908,-11.535 h0.52 r270; Mechanical 1 "Display outline" at 49.799,-5.767 h0.52 r270
P1: Bottom Overlay "36" at 1.886,-95.968 h0.75; Bottom Overlay "35" at 1.886,-98.508 h0.75; Bottom Overlay "1" at 48.876,-98.127 h0.75; Bottom Overlay "2" at 49.003,-95.714 h0.75
P2: Bottom Overlay "36" at 1.886,-2.508 h0.75; Bottom Overlay "35" at 1.841,-5.016 h0.75; Bottom Overlay "1" at 49.13,-5.048 h0.75; Bottom Overlay "2" at 49.212,-2.476 h0.75
Uiso1: Bottom Overlay "*" at 15.761,-30.225 h1.27 r90; Mechanical 13 "*" at 16.738,-31.749 h1.27 r90